# Altium PCB Plasma Speaker Bridge.PcbDoc
Units mm, origin at the board's own origin, x right, y up, seen from the top; angles counter-clockwise.
Board outline 100 x 80 mm, 2 copper layers (Top Layer, Bottom Layer); 31 components, 19 nets, 89 pads, 146 vias.
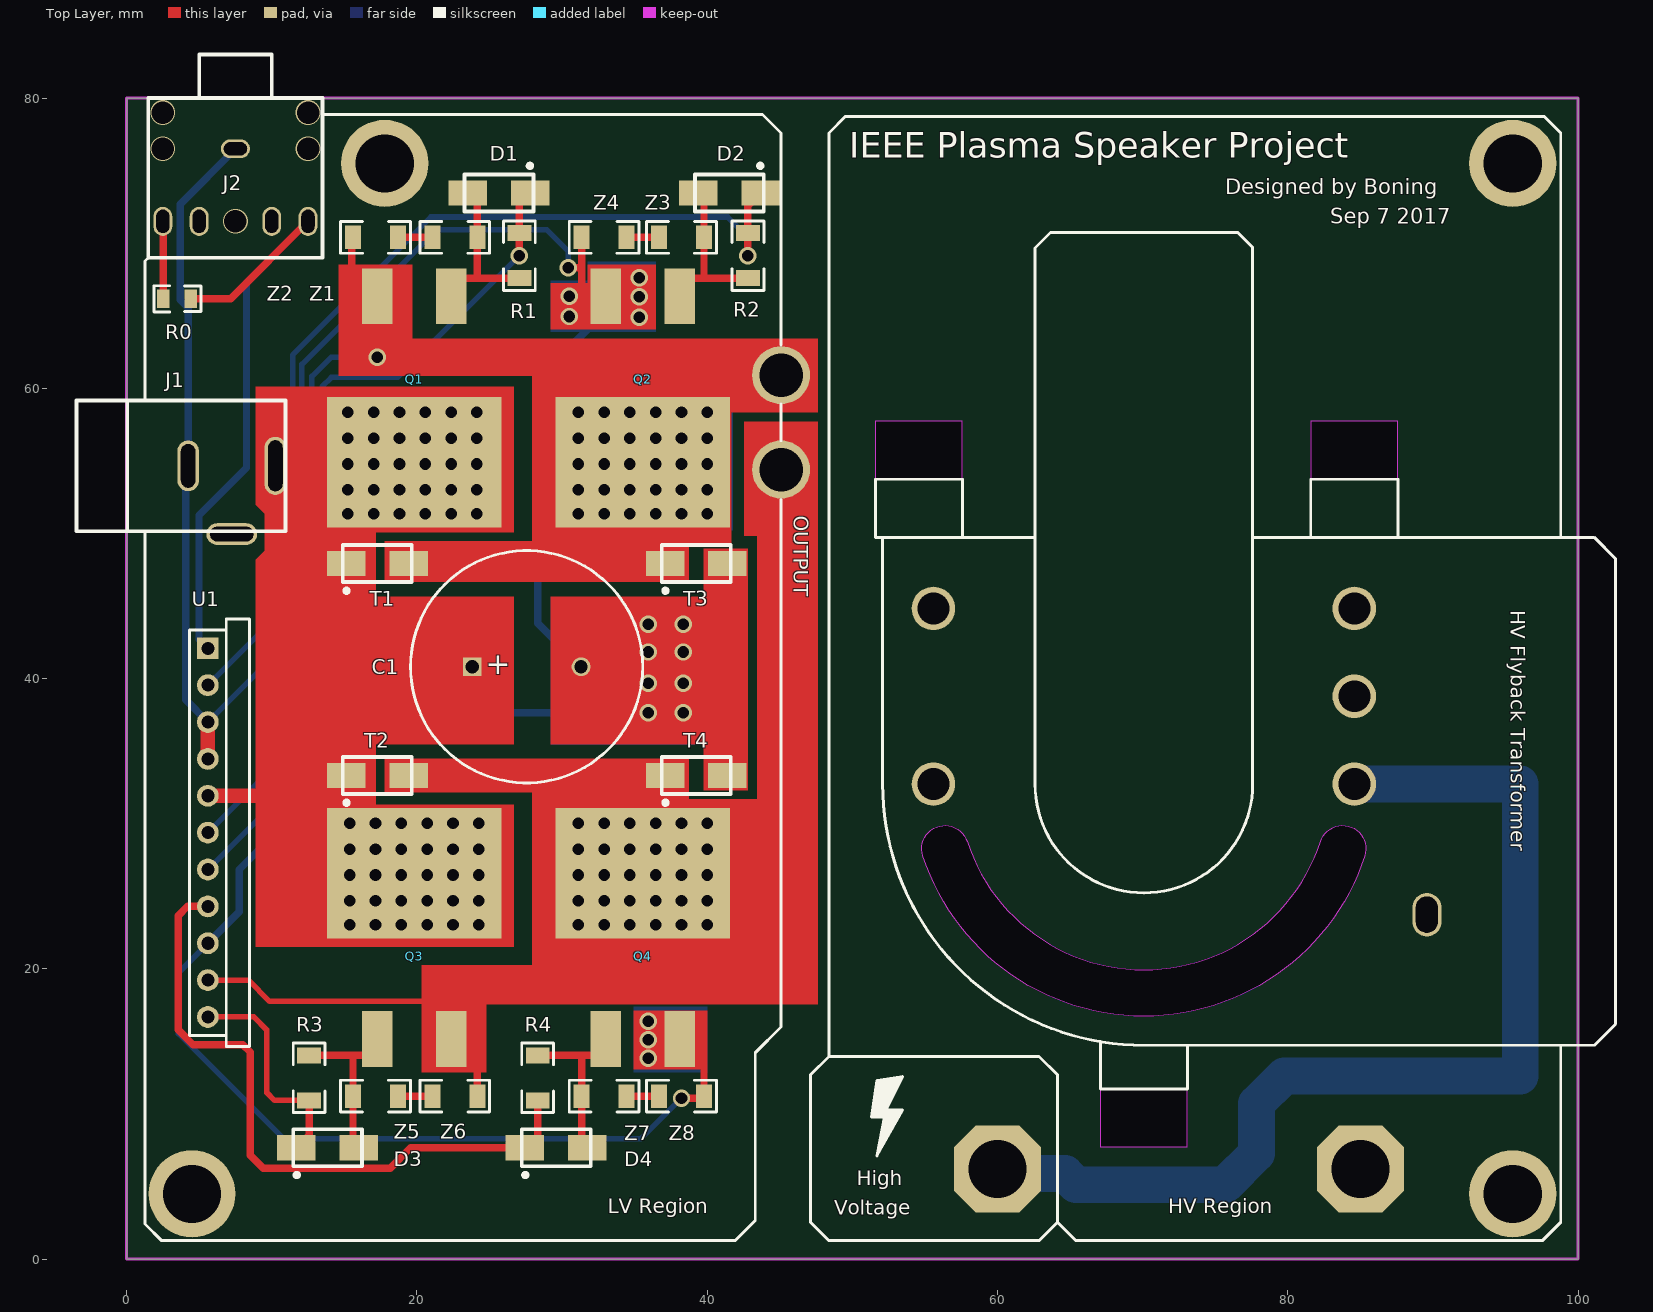
[diagram p0: Top Layer view]
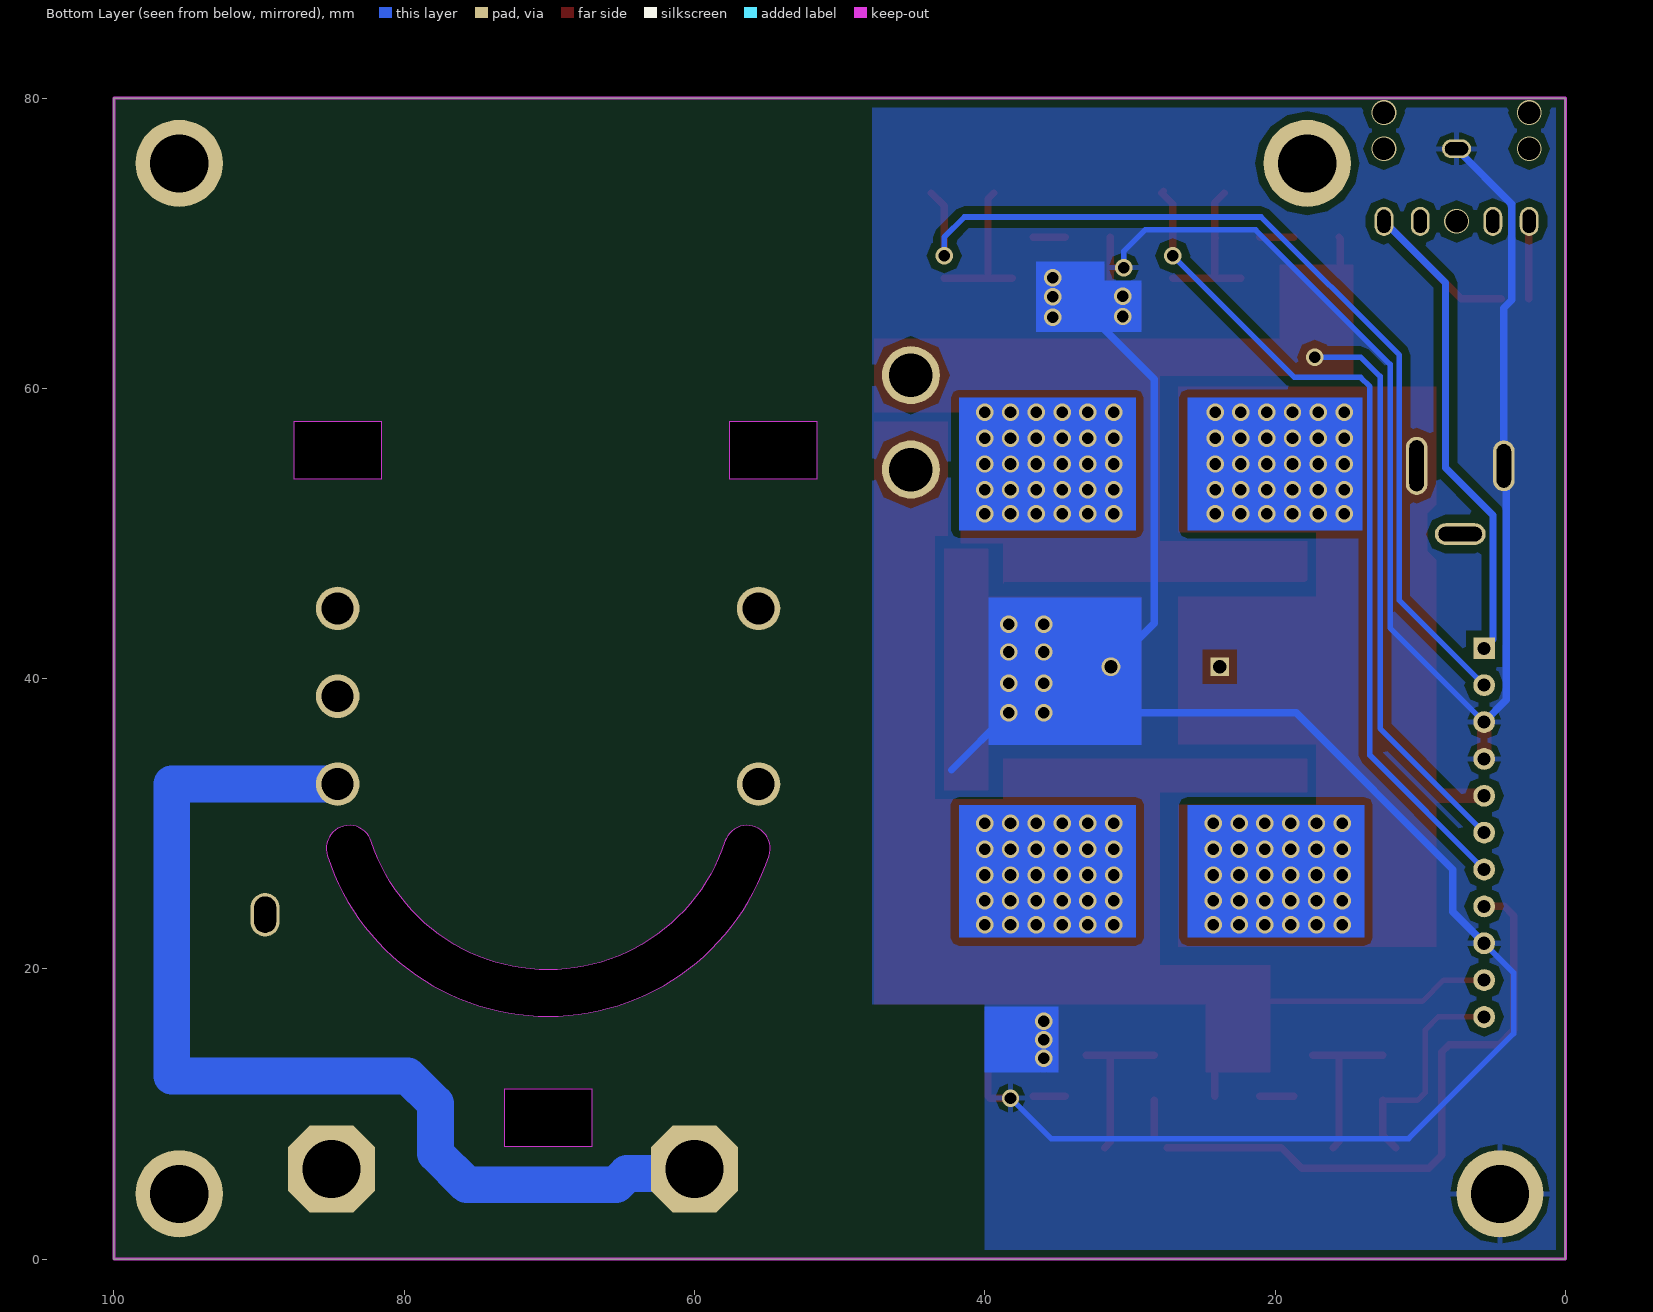
[diagram p1: Bottom Layer view, seen from below]

## Layer stack, top to bottom
Top Solder: solder mask 0.0102, Solder Resist, Dk 3.5
Top Layer: signal copper 0.0356
Dielectric 1: dielectric 0.32, FR-4, Dk 4.8
Bottom Layer: signal copper 0.0356
Bottom Solder: solder mask 0.0102, Solder Resist, Dk 3.5

## Board outline
0,0 0,80 100,80 100,0

## Design rules (kind name [scope] priority, off if disabled: settings)
BoardOutlineClearance [All] p1: gap=-2
Clearance [(InNet('GND') AND InNamedPolygon('Bottom Ground'))] p1: gap=0.508
Clearance Clearance_1 [All] p2: gap=0.254
ComponentClearance [All] p1: gap=0.254 collisioncheckmode=3 verticalgap=0.254 showdistances=TRUE
PolygonConnect PolygonConnect_2 [(InNet('GND') AND InPolygon)] p1: connectstyle=Relief reliefconductorwidth=0.254 reliefentries=4 polygonreliefangle="90 Angle" airgapwidth=0.254
PolygonConnect PolygonConnect_1 [((InNet('GND') AND InComponent('J1'))) Or (InNet('GND') AND InComponent('C1'))] p2: connectstyle=Direct reliefconductorwidth=0.254 reliefentries=4 polygonreliefangle="90 Angle" airgapwidth=0.254
PolygonConnect [All] p3: connectstyle=Relief reliefconductorwidth=0.381 reliefentries=4 polygonreliefangle="90 Angle" airgapwidth=0.381
RoutingVias [All] p1: holewidth=0.711 width=1.27 viastyle="Through Hole" minholewidth=0.711 minwidth=1.27 maxholewidth=0.711 maxwidth=1.27
SolderMaskExpansion [All] p1: expansion=0.102
Width [All] p1: maxlimit=2.54 minlimit=0.254 preferedwidth=1.016
29 further rules are at their usual default settings.

## Components (designator, comment, footprint, x,y, rotation, side; value= is the part's Value field where it differs from the comment)
C1 "Tank Cap" RB7.5H30 27.559,40.814 r180 top
D1 "1N5819" DO-214 25.654,73.453 r0 top
D2 "1N5819" DO-214 41.529,73.453 r0 top
D3 "1N5819" DO-214 13.843,7.667 r180 top
D4 "1N5819" DO-214 29.591,7.667 r180 top
"HV Flyback Transformer" "HV Flyback Transformer" 154-207E 84.582,32.732 r270 top (schematic designator HV)
J1 "PWR2.5" "2.5 PWR" 7.239,54.657 r180 top
J2 "Phonejack Stereo SW2" "Phonejack Type-1" 7.493,71.501 r270 top
OUTPUT "Inductor Iron" CON-3.0 45.085,60.903 r270 top
Q1 "IRF540" TO-263 19.812,54.911 r180 top
Q2 "IRF540" TO-263 35.56,54.911 r180 top
Q3 "IRF540" TO-263 19.812,26.59 r0 top
Q4 "IRF540" TO-263 35.56,26.59 r0 top
R0 "0603" D0805 3.469,66.167 r0 top
R1 "1206" D1206 27.051,69.135 r270 top
R2 "1206" D1206 42.799,69.135 r270 top
R3 "1206" D1206 12.573,12.493 r270 top
R4 "1206" D1206 28.321,12.493 r270 top
T1 "TVS" DO-214 17.272,47.926 r180 top
T2 "TVS" DO-214 17.272,33.321 r180 top
T3 "TVS" DO-214 39.243,47.926 r180 top
T4 "TVS" DO-214 39.243,33.321 r180 top
U1 "MODULE" "Plasma Speaker Module" 5.588,42.084 r180 top
Z1 "20V" D1206 22.606,70.405 r0 top
Z2 "20V" D1206 17.145,70.405 r180 top
Z3 "20V" D1206 38.227,70.405 r0 top
Z4 "20V" D1206 32.893,70.405 r180 top
Z5 "20V" D1206 17.145,11.223 r180 top
Z6 "20V" D1206 22.606,11.223 r0 top
Z7 "20V" D1206 32.893,11.223 r180 top
Z8 "20V" D1206 38.227,11.223 r0 top

## Footprints (in the part's own frame and the unit in brackets; to place one, negate y for a bottom-side part, rotate by r counter-clockwise, add the part's x,y. Pads: shape width x height; smd on the part's side, far side on the other; paste and mask are expansions set on the pad)
"2.5 PWR" [mm] "DC Power Jack, 2.5mm, KLD Series, PCB Mount"
  oval 1.5x4 hole 1 slot 3.5 at 90 deg: 1(-3,0)
  oval 1.5x3.5 hole 1 slot 3 at 90 deg: 2(3,0)
  oval 3.5x1.5 hole 1 slot 3 at 0 deg: 3(0,4.7)
  silkscreen extent -3.7,-4.5 10.7,4.5, body extent -3.68,-4.45 10.67,4.45, height 11
154-207E [mm]
  round 3 hole 2.2: 0(-12.1,0) 0(-12.1,-29) 0(-6.05,0) 0(0,-29) 1(0,0)
  oval 3x2 hole 1.5 slot 2.5 at 0 deg: 0(9,5)
  Keep-Out Layer board cut-out: 21,-17.5 25,-17.5 25,-11.5 21,-11.5
  Keep-Out Layer board cut-out: -25,-33 -21,-33 -21,-27 -25,-27
  Keep-Out Layer board cut-out: -25,-3 -21,-3 -21,3 -25,3
  Keep-Out Layer board cut-out: 4.944,0.717 11.663,-3.547 15.497,-10.521 15.497,-18.479 11.663,-25.453 4.944,-29.717 4.944,-29.717 4.944,-29.717 4.117,-29.76 3.379,-29.384 2.928,-28.69 2.885,-27.863 3.261,-27.125 3.955,-26.674 3.955,-26.674 9.331,-23.262 12.398,-17.683 12.398,-11.317 9.331,-5.738 3.955,-2.326 3.955,-2.326 3.261,-1.875 2.885,-1.137 2.928,-0.31 3.379,0.384 4.117,0.76 4.944,0.717
  silkscreen extent -38,-33 21,18
CON-3.0 [mm] "High Current Connector 3.0mm"
  round 4 hole 3: 1(0,0) 2(6.5,0)
D0805 [mm] "D0805"
  rect 0.85x1.27 smd: 1(-0.95,0) 2(0.95,0)
  silkscreen extent -1.6,-0.9 1.65,0.9, body extent -1,-0.64 1,0.64, height 1.25
D1206 [mm] "D1206"
  rect 1.1x1.65 smd: 1(-1.55,0) 2(1.55,0)
  silkscreen extent -2.4,-1.1 2.4,1.1, body extent -1.6,-0.8 1.6,0.8, height 1.1
DO-214 [mm] "DO-214"
  rect 2.65x1.75 smd: 1(-2.15,0) 2(2.15,0)
  silkscreen extent -2.37,-1.28 2.37,2.01, body extent -2.37,-1.25 2.37,1.28, height 2.2
"Phonejack Type-1" [mm] "Phonejack Type-1"
  oval 1.3x2 hole 0.9 slot 1.6 at 90 deg: 1(-5,0)
  oval 2x1.3 hole 0.9 slot 1.6 at 0 deg: 2(0,5) 3(0,2.5) 4(0,-2.5) 5(0,-5)
  silkscreen extent -11.5,-6 2.5,6, body extent -11.56,-5.97 2.54,5.97, height 5.5
"Plasma Speaker Module" [mm] "Signal Module for Plasma Speaker"
  rect 1.5x1.5 hole 0.9: 1(0,0)
  round 1.5 hole 0.9: 2(0,2.54) 3(0,5.08) 4(0,7.62) 5(0,10.16) 6(0,12.7) 7(0,15.24) 8(0,17.78) 9(0,20.32) 10(0,22.86) 11(0,25.4)
  silkscreen extent -2.87,-2.03 1.27,27.43
RB7.5H30 [mm] "Polarized Capacitor (Radial); 2 Leads"
  rect 1.3x1.3 hole 0.9: 1(3.75,0)
  round 1.3 hole 0.9: 2(-3.75,0)
  silkscreen extent -8,-8 8,8
TO-263 [mm] "TO-263 Surface mount device"
  rect 2.1x3.85 smd: 1(-2.54,-11.43) 3(2.54,-11.43)
  rect 12x9 smd: 2(0,0)

## Part data
C1: library part Cap2, "Capacitor"
D1 D2 D3 D4: library part "Diode S", "Zener Diode"
"HV Flyback Transformer": library part "154-207E FBT"
J1: "Low Voltage Power Supply Connector"
J2: "3-Conductor Jack with 2 break contacts (normals) and 2 auxiliary make contacts"
OUTPUT: "Magnetic-Core Inductor"
Q1 Q2 Q3 Q4: library part NMOS-2, "N-Channel Power MOSFET"
R0 R1 R2 R3 R4: library part Res1, "Resistor"
T1 T2 T3 T4: library part "TVS Diode", "TVS Diode"
U1: library part "Plasma Speaker", "Plasma Speaker Signal Module"
Z1 Z2 Z3 Z4 Z5 Z6 Z7 Z8: library part Zener, "Zener Diode"

## Free pads (board coordinates)
  oct 6x6 hole 4: 1(60,6.2) 2(85,6.2)
  round 6 hole 4: 3(4.5,4.5) 4(17.78,75.5) 4(95.5,4.5) 4(95.5,75.5)

## Via types
v1: diameter 1.2, hole 0.8, Top Layer to Bottom Layer, tented both sides, 141 vias
v2: diameter 1.7, hole 1.55, Top Layer to Bottom Layer, tented both sides, 5 vias

## Nets (pads, with @x,y where several pads share a name; then routed paths per layer and width w, separated by ;. In a path a pad name is that pad's centre, name@x,y a point inside that pad or via, vN(x,y) a via of type N, cw(c..) or ccw(c..) an arc to the next point about the centre after c; other vN are vias at no path point)
GND: C1.2 J1.2 J2.1 pad.3 Q2.3 Q4.3 T3.1 T4.1 U1.3 U1.4 U1.9 Z4.2 Z8.2 | length 257.8
  Top Layer w0.508: v1(30.416,68.31) 31.28,68.31 31.343,68.373 ; C1.2 41.393,40.814 ; Z4.2 31.343,68.373 ; Q2.3 31.369,66.341 31.343,66.367 31.343,68.373 ; Q4.3 39.751,15.16 39.777,15.134 Z8.2 39.65,11.096 v1(38.227,11.096) ; T4.1 41.393,40.814 ; T3.1 41.393,40.814
  Top Layer w1.016: U1.4 U1.3
  Bottom Layer w0.381: U1.9 3.556,19.732 3.556,15.541 10.795,8.302 35.433,8.302 v1(38.227,11.096) ; U1.3 12.068,43.484 12.068,61.645 21.336,70.913 28.956,70.913 30.416,69.453 v1(30.416,68.31)
  Bottom Layer w0.508: U1.9 7.747,23.923 7.747,26.844 18.542,37.639 v1(35.941,37.639) v1(38.354,37.639) 42.291,33.702 ; U1.3 4.064,38.528 4.064,54.482 J1.2 4.239,65.531 3.683,66.087 3.683,72.691 J2.1 ; C1.2 28.321,43.802 28.321,60.626 v1(35.306,67.611)
  other v1: 35.941,13.843 35.941,15.113 35.941,16.383 35.941,39.671 38.354,39.671 35.941,41.83 38.354,41.83 35.941,43.735 38.354,43.735 35.306,64.897 30.48,64.944 35.306,66.294 30.48,66.341
HG1: D1.2 R1.1 U1.7 | length 58.7
  Top Layer w0.508: v1(27.051,69.135) R1.1 27.051,72.7 D1.2 D1.2@27.686,73.571
  Bottom Layer w0.381: U1.7 13.462,34.718 13.462,60.118 14.097,60.753 18.669,60.753 v1(27.051,69.135)
HG2: D3.2 R3.2 U1.11 | length 15.5
  Top Layer w0.381: U1.11 8.763,16.684 9.652,15.795 9.652,11.477 10.186,10.943 R3.2
  Top Layer w0.508: D3.2 12.573,8.547 R3.2
HS1: OUTPUT.1 Q1.3 Q2.2 T1.1 T3.2 U1.6 Z2.2 | length 53
  Top Layer w0.508: Z2.2 15.494,70.304 15.494,66.341 Q1.3 ; Q2.2 37.093,53.378 T3.2
  Bottom Layer w0.381: U1.6 12.763,36.56 12.763,60.817 14.097,62.15 v1(17.272,62.15)
  other v1: 31.115,51.355 32.893,51.355 34.671,51.355 36.449,51.355 38.227,51.355 40.005,51.355 31.115,53.006 32.893,53.006 34.671,53.006 36.449,53.006 38.227,53.006 40.005,53.006 31.115,54.784 32.893,54.784 34.671,54.784 36.449,54.784 38.227,54.784 40.005,54.784 31.115,56.562 32.893,56.562 34.671,56.562 36.449,56.562 38.227,56.562 40.005,56.562 31.115,58.34 32.893,58.34 34.671,58.34 36.449,58.34 38.227,58.34 40.005,58.34
HS2: OUTPUT.2 Q3.3 Q4.2 T2.1 T4.2 U1.10 Z6.2 | length 25.2
  Top Layer w0.381: U1.10 8.382,19.224 9.842,17.764 20.383,17.764
  Top Layer w0.508: Z6.2 24.156,13.61 ; Q4.2 37.093,28.123 T4.2
  other v1: 31.115,23.034 32.893,23.034 34.671,23.034 36.449,23.034 38.227,23.034 40.005,23.034 31.115,24.685 32.893,24.685 34.671,24.685 36.449,24.685 38.227,24.685 40.005,24.685 31.115,26.463 32.893,26.463 34.671,26.463 36.449,26.463 38.227,26.463 40.005,26.463 31.115,28.241 32.893,28.241 34.671,28.241 36.449,28.241 38.227,28.241 40.005,28.241 31.115,30.019 32.893,30.019 34.671,30.019 36.449,30.019 38.227,30.019 40.005,30.019
HVOUT: "HV Flyback Transformer.1" pad.1 | length 73.1
  Bottom Layer w2.54: pad.1 60.311,5.889 64.643,5.889 65.405,5.127 75.692,5.127 77.851,7.286 77.851,10.715 79.756,12.62 96.012,12.62 96.012,32.732 84.582,32.732
LG1: D2.2 R2.1 U1.2 | length 67
  Top Layer w0.508: v1(42.799,69.135) R2.1 42.799,72.573 D2.2
  Bottom Layer w0.381: U1.2 11.433,45.389 11.433,62.28 20.955,71.802 41.402,71.802 42.799,70.405 v1(42.799,69.135)
LG2: D4.2 R4.2 U1.8 | length 45.1
  Top Layer w0.508: U1.8 4.191,24.304 3.556,23.669 3.556,15.795 4.572,14.779 8.001,14.779 8.509,14.271 8.509,7.159 9.398,6.27 18.161,6.27 19.558,7.667 D4.2 ; 28.321,8.547 R4.2
MIDI: J2.2 R0.2 U1.1 | length 43.1
  Top Layer w0.508: R0.2 7.159,66.167 J2.2
  Bottom Layer w0.508: U1.1 4.981,42.691 4.981,51.256 8.255,54.53 8.255,67.263 J2.2
NetD1_1: D1.1 Q1.1 R1.2 Z1.2 | length 10.9
  Top Layer w0.508: Q1.1@22.352,67.585 24.156,67.585 ; D1.1 24.156,72.801 Z1.2 24.13,70.379 24.156,70.353 24.156,67.585 ; R1.2 24.156,67.585
NetD2_1: D2.1 Q2.1 R2.2 Z3.2 | length 10.7
  Top Layer w0.508: Q2.1@38.1,67.585 39.777,67.585 ; D2.1 39.777,73.055 Z3.2 39.777,67.585 ; R2.2 39.777,67.585
NetD3_1: D3.1 Q3.1 R3.1 Z5.2 | length 11.4
  Top Layer w0.508: R3.1 15.621,14.043 ; D3.1 15.595,8.065 Z5.2 15.595,14.017 15.621,14.043 ; Q3.1@17.399,14.043 15.621,14.043
NetD4_1: D4.1 Q4.1 R4.1 Z7.2 | length 11.3
  Top Layer w0.508: R4.1 31.242,14.043 ; D4.1 31.343,8.065 Z7.2 31.343,13.942 31.242,14.043 ; Q4.1@33.02,14.043 31.242,14.043
NetJ2_5: J2.5 R0.1 | length 5.3
  Top Layer w0.508: J2.5 2.519,71.475 R0.1
NetZ1_1: Z1.1 Z2.1 | length 2.4
  Top Layer w0.508: Z2.1 Z1.1
NetZ3_1: Z3.1 Z4.1 | length 2.2
  Top Layer w0.508: Z4.1 Z3.1
NetZ5_1: Z5.1 Z6.1 | length 2.4
  Top Layer w0.508: Z5.1 Z6.1
NetZ7_1: Z7.1 Z8.1 | length 2.2
  Top Layer w0.508: Z7.1 Z8.1
VCC: C1.1 J1.1 Q1.2 Q3.2 T1.2 T2.2 U1.5 | length 47.2
  Top Layer w1.016: U1.5 9.271,31.924 ; J1.1 14.986,54.657 15.122,54.521 T1.2 15.122,40.941 ; Q3.2 15.122,31.28 T2.2 15.122,40.941 ; C1.1 15.249,40.814 15.122,40.941
  other v1: 15.367,23.034 17.145,23.034 18.923,23.034 20.701,23.034 22.479,23.034 24.257,23.034 15.367,24.685 17.145,24.685 18.923,24.685 20.701,24.685 22.479,24.685 24.257,24.685 15.367,26.463 17.145,26.463 18.923,26.463 20.701,26.463 22.479,26.463 24.257,26.463 15.367,28.241 17.145,28.241 18.923,28.241 20.701,28.241 22.479,28.241 24.257,28.241 15.367,30.019 17.145,30.019 18.923,30.019 20.701,30.019 22.479,30.019 24.257,30.019 15.24,51.355 17.018,51.355 18.796,51.355 20.574,51.355 22.352,51.355 24.13,51.355 15.24,53.006 17.018,53.006 18.796,53.006 20.574,53.006 22.352,53.006 24.13,53.006 15.24,54.784 17.018,54.784 18.796,54.784 20.574,54.784 22.352,54.784 24.13,54.784 15.24,56.562 17.018,56.562 18.796,56.562 20.574,56.562 22.352,56.562 24.13,56.562 15.24,58.34 17.018,58.34 18.796,58.34 20.574,58.34 22.352,58.34 24.13,58.34
pads on no net: "HV Flyback Transformer.0" J1.3 J2.3 J2.4
copper on no net:
  other v2: 7.493,71.501 2.493,76.501 12.493,76.501 2.493,79.001 12.493,79.001

## Polygon pours and split planes (outlines as drawn)
GND on Bottom Layer "Bottom Ground" (solid, pour order 2): 0,80 47.752,80 47.752,17.573 40.005,17.573 40.005,0 0,0

## Keep-outs
Keep-Out Layer:
  the board outline again, w0.2

## Other copper
Top Layer:
  rectangle net GND: 34.925,13.081 40.005,17.145
  region net GND: 31.75,67.23 29.21,67.23 29.21,64.055 31.75,64.055
  region net GND: 31.75,68.5 31.75,64.055 36.449,64.055 36.449,68.5
  region net VCC: 8.89,60.118 8.89,51.99 9.525,51.355 9.525,48.815 8.89,48.18 8.89,21.51 26.67,21.51 26.67,31.289 17.145,31.289 17.145,35.48 26.67,35.48 26.67,45.64 17.145,45.64 17.145,50.085 26.67,50.085 26.67,60.118
  region net HS2: 27.94,31.67 27.94,20.24 20.32,20.24 20.32,12.874 24.765,12.874 24.765,17.573 42.545,17.573 42.545,31.67
  region net HS2: 27.94,31.416 27.94,32.178 17.78,32.178 17.78,34.464 38.735,34.464 38.735,31.416
  region net HS1: 17.78,49.45 17.78,46.783 17.907,46.656 38.608,46.656 38.735,46.529 38.735,50.085 29.21,50.085 29.21,49.45
  region net HS1: 14.605,68.5 14.605,60.88 27.94,60.88 27.94,49.45 28.067,49.323 41.656,49.323 41.656,63.42 19.685,63.42 19.685,68.5
  region net HS1: 41.275,63.42 47.625,63.42 47.625,58.34 41.275,58.34
  region net HS2: 42.545,57.705 42.545,49.831 43.434,49.831 43.434,31.67 42.545,31.67 42.545,17.573 47.625,17.573 47.625,57.705
  region net GND: 29.21,45.64 29.21,35.48 39.751,35.48 39.751,32.305 42.799,32.305 42.799,48.942 39.751,48.942 39.751,45.64
Bottom Layer:
  rectangle net HS1: 29.591,50.212 41.783,59.356
  rectangle net VCC: 13.97,50.212 26.035,59.356
  rectangle net HS2: 29.591,22.145 41.783,31.289
  rectangle net VCC: 13.843,22.145 26.035,31.289
  rectangle net GND: 34.925,12.86 40.005,17.399
  rectangle net GND: 29.21,35.433 39.751,45.593
  region net GND: 29.21,63.881 36.449,63.881 36.449,68.707 31.75,68.707 31.75,67.421 29.21,67.421

## Silkscreen, mask and mechanical layers (free items; w line width, h text height)
Top Overlay:
  region: 51.689,12.319 51.308,9.779 52.197,9.779 51.689,7.112 53.467,10.287 52.324,10.287 53.467,12.573
  lines w0.2: 1.27,50.157 1.27,2.413 2.413,1.27 41.91,1.27 43.307,2.667 ; 1.27,59.157 1.27,68.778 1.493,69.001 ; 13.493,78.867 43.815,78.867 45.085,77.597 45.085,62.992 ; 43.307,4.191 43.307,2.667 ; 45.085,52.324 45.085,16.002 43.307,14.224 43.307,2.667 ; 45.085,56.388 45.085,58.928 ; 51.943,9.779 51.308,9.779 ; 98.806,14.732 98.806,2.54 97.536,1.27 65.405,1.27 64.135,2.54 ; 98.806,49.732 98.806,77.597 97.663,78.74 49.53,78.74 48.387,77.597 48.387,76.327 48.387,13.97 ; 48.387,13.97 47.117,12.7 47.117,2.54 48.387,1.27 62.865,1.27 64.135,2.54 ; 48.387,13.97 62.865,13.97 64.135,12.7 64.135,2.54 ; 51.308,9.779 52.197,9.779 51.689,7.112 53.467,10.287 ; 51.308,9.779 51.689,12.319 53.467,12.573 52.324,10.287 ; 52.324,10.287 53.086,10.287 53.467,10.287 ; 52.324,10.287 53.467,10.287
  text "IEEE Plasma Speaker Project" at 49.784,75.311 h3
  text "Designed by Boning" at 75.692,73.025 h1.8
  text "Sep 7 2017" at 82.931,70.993 h1.8
  text "High" at 50.292,5.08 h1
  text "LV Region" at 33.147,3.175 h1
  text "HV Region" at 71.755,3.175 h1
  text "Voltage" at 48.768,3.048 h1
Mechanical 1:
  lines w0.2: 45,0 45,80 ; 55,0 55,80
Mechanical 5:
  the board outline again, w0.2

## Text inside footprints (layer, text, board x,y; h text height)
C1: Top Overlay "+" at 26.459,41.589 h1.5 r180